# Altium PCB 65W LED Board.PcbDoc (part 2 of 3)
Units mm, origin at the board's own origin, x right, y up, seen from the top; angles counter-clockwise.
Board outline 40 x 69 mm, 4 copper layers (Top Layer, Layer 1, Layer 2, Bottom Layer), stack 1.573 mm thick; 54 components, 26 nets, 122 pads, 144 vias.
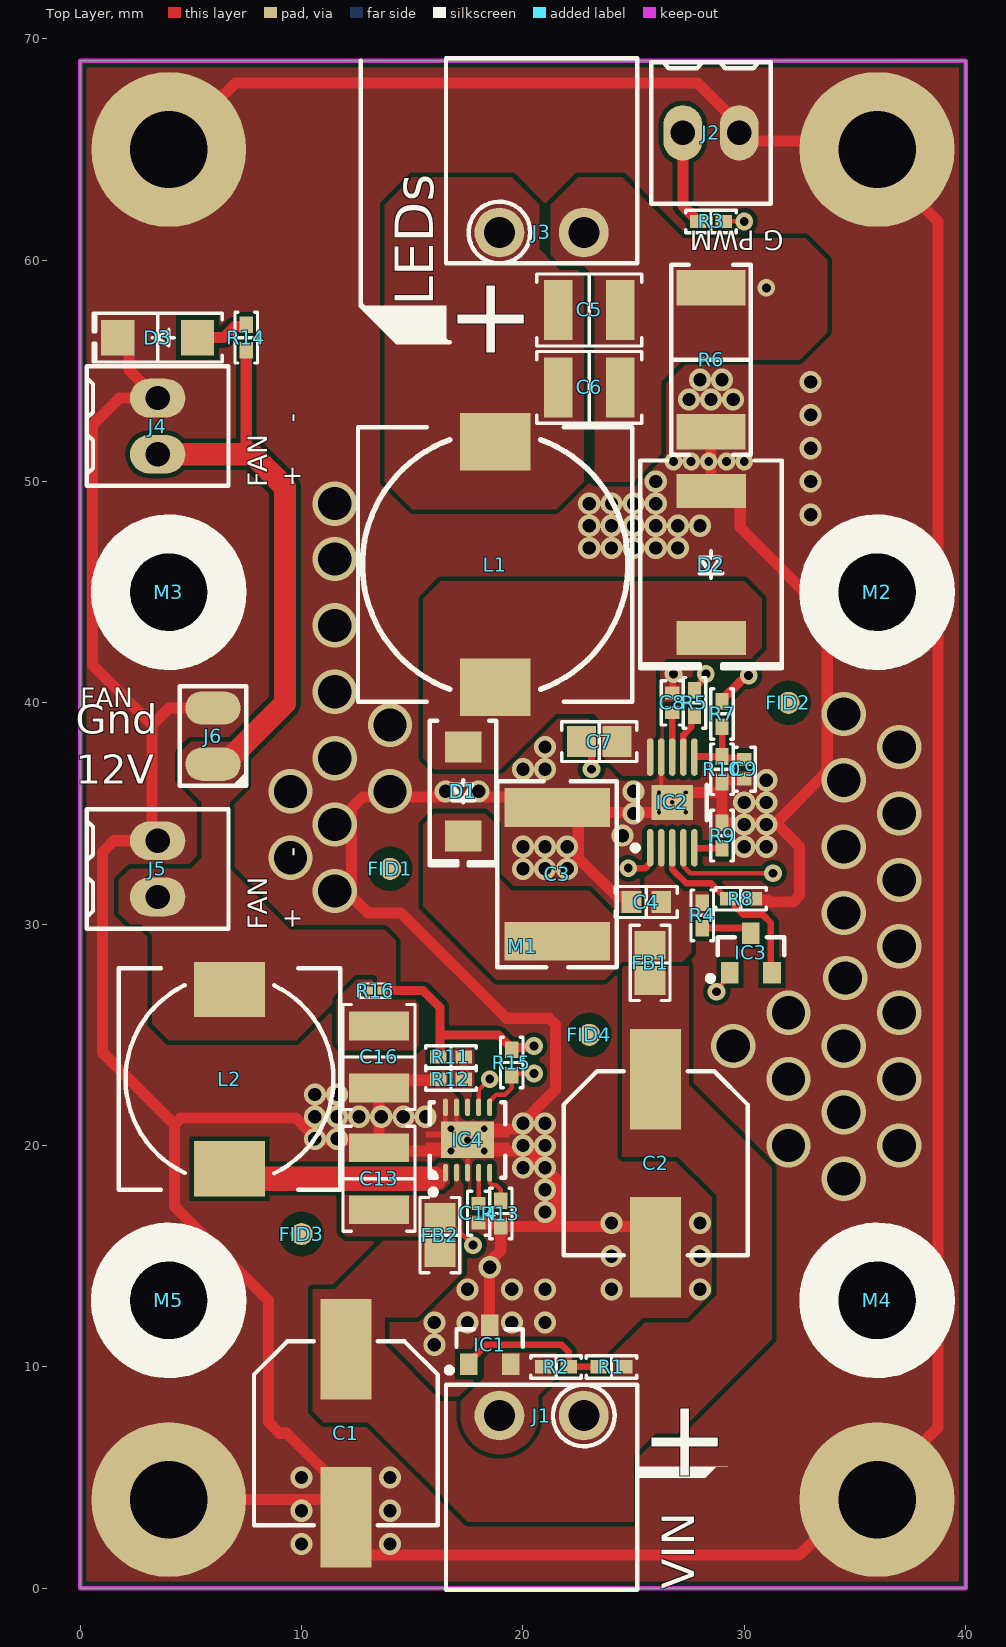
[diagram p0: Top Layer view]

## Part data (continued)
J2 J4 J5: "TERM BLK 2P SIDE ENT 2.54MM PCB", Color=Green, Current=10A, Flammability Rating="UL94 V-0", Manufacturer 1="TE Connectivity", Manufacturer Part Number 1=282834-2, Max Operating Temperature=105°C, Max Supply Voltage (AC)=150V, Min Operating Temperature=-40°C, Package Quantity=300, Supplier Part Number 1=A98333-ND, Approvals=UL, Category="Terminal Blocks", Closed End="No (Without)", ComponentLink1Description=https://datasheet.ciiva.com/11758/0900766b80e7dc96-11758675.pdf?src-supplier=RSComponents, ComponentLink1URL=https://datasheet.ciiva.com/11758/0900766b80e7dc96-11758675.pdf?src-supplier=RSComponents, ComponentLink2Description=https://datasheet.ciiva.com/16386/282834-2-16386363.pdf?src-supplier=Future+Electronics, ComponentLink2URL=https://datasheet.ciiva.com/16386/282834-2-16386363.pdf?src-supplier=Future+Electronics, ComponentLink3Description=https://datasheet.ciiva.com/15169/getdatasheetpartid-155864-15169558.pdf?src-supplier=Verical, ComponentLink3URL=https://datasheet.ciiva.com/15169/getdatasheetpartid-155864-15169558.pdf?src-supplier=Verical, ComponentLink4Description=https://datasheet.ciiva.com/16676/eng-cs-1308389-eurostyle-terminal-blocks-0607-16676126.pdf?src-supplier=Avnet+Europe, ComponentLink4URL=https://datasheet.ciiva.com/16676/eng-cs-1308389-eurostyle-terminal-blocks-0607-16676126.pdf?src-supplier=Avnet+Europe, ComponentLink5Description=https://datasheet.ciiva.com/30166/eng-cs-1308389-eurostyle-terminal-blocks-0607-30166974.pdf?src-supplier=Onlinecomponents.com, ComponentLink5URL=https://datasheet.ciiva.com/30166/eng-cs-1308389-eurostyle-terminal-blocks-0607-30166974.pdf?src-supplier=Onlinecomponents.com, ComponentLink6Description=https://datasheet.ciiva.com/14609/70086732-14609670.pdf?src-supplier=Allied+Electronics, ComponentLink6URL=https://datasheet.ciiva.com/14609/70086732-14609670.pdf?src-supplier=Allied+Electronics, ComponentLink7Description=https://datasheet.ciiva.com/3141/eng-cs-1308389-eurostyle-terminal-blocks-0607-3141115.pdf?src-supplier=Avnet, ComponentLink7URL=https://datasheet.ciiva.com/3141/eng-cs-1308389-eurostyle-terminal-blocks-0607-3141115.pdf?src-supplier=Avnet, ComponentLink8Description=https://datasheet.ciiva.com/823/eng-cd-282834-c1-823453.pdf?src-supplier=Digi-Key, ComponentLink8URL=https://datasheet.ciiva.com/823/eng-cd-282834-c1-823453.pdf?src-supplier=Digi-Key, Connector Type=Receptacle, Contact Material=Brass, Contact Plating=Tin, Current Rating=10A, Depth=6.5mm, ELV=Compliant, Gender=Male, Housing Color=Green, Housing Material=Polyamide, Interlock="No (Without)", Lead Free="Lead Free", Length=5.54mm, Material=Nylon, Max Current Rating=10A, Max Voltage Rating (AC)=150V, Mount="Through Hole", Number of Circuits=2, Number of Contacts=2, Number of Levels=1, Number of Poles=2, Number of Positions=2, Number of Positions Per Level=2, Number of Rows=1, Orientation=Straight, Packaging=Bulk, Pitch=2.54mm, Plating=Brass,Steel, Pricing 1="1=0.88000, 10=0.62000, 25=0.57840, 50=0.52500, 100=0.52280, 250=0.44144, 500=0.41822, 1000=0.37175, 5000=0.34852 (USD)", Radiation Hardening=No, REACH SVHC=Unknown, RoHS=Yes, Screw Flange="No (Without)", Screwless Terminal Block="Yes (With)", Side Stackable="Yes (With)", Stock 1=16578, Supplier 1=Digi-Key, Tail Length=3.4mm, Termination=Solder, Thread Size=M1.6, Voltage=150V, Voltage Rating=150V, Width=6.5mm, Wire Gauge (Max)=30AWG, Wire Gauge (Min)=30AWG, Wire/Cable Gauge=30AWG
L1: library part Inductor, "INDUCTOR SHIELD PWR 33UH 12575", Case/Package=Nonstandard, Current Rating=3.4A, DC Resistance (DCR)=47.4mR, Manufacturer 1=TDK, Manufacturer Part Number 1=SLF12575T-330M3R2-PF, Max Operating Temperature=105°C, Min Operating Temperature=-40°C, Package Quantity=500, Saturation Current=3.2A, Supplier Part Number 1=445-173081-1-ND, Test Frequency=1kHz, Tolerance=20%, Category="Fixed Inductors", ComponentLink1Description=https://datasheet.ciiva.com/3865/print-detail-pdf-phplangenpart-noslf12575t-330m3r2-pfnreimp-unit-3865589.pdf?src-supplier=Arrow, ComponentLink1URL=https://datasheet.ciiva.com/3865/print-detail-pdf-phplangenpart-noslf12575t-330m3r2-pfnreimp-unit-3865589.pdf?src-supplier=Arrow, ComponentLink2Description=https://datasheet.ciiva.com/11802/0900766b812b7d4f-11802238.pdf?src-supplier=RSComponents, ComponentLink2URL=https://datasheet.ciiva.com/11802/0900766b812b7d4f-11802238.pdf?src-supplier=RSComponents, Composition=Wirewound, Core Material=Ferrite, DC Current=3.4A, Depth=12.8mm, Height=7.5mm, Height - Seated (Max)=0.309inch, Inductance=33uH, Lead Free="Lead Free", Length=12.5mm, Max DC Current=3.4A, Military Standard=Not, Mount="Surface Mount", Packaging="Tape and Reel", Pricing 1="1=2.06000, 10=1.89800, 100=1.32830 (USD)", RoHS=Yes, Shielding=Shielded, Stock 1=2896, Supplier 1=Digi-Key, Termination=SMD/SMT, Width=0.492inch
L2: library part Inductor, "FIXED IND 100UH 1.1A 240 MOHM", Case/Package=Nonstandard, Current Rating=1.1A, DC Resistance (DCR)=240mR, Inductance Tolerance=20%, Manufacturer 1=TDK, Manufacturer Part Number 1=SLF10145T-101M1R0-PF, Max DC Current=1A, Max Operating Temperature=105°C, Min Operating Temperature=-20°C, Package Quantity=500, Supplier Part Number 1=445-1976-1-ND, Test Frequency=1kHz, Category="Fixed Inductors", ComponentLink1Description=https://datasheet.ciiva.com/3866/print-detail-pdf-phplangenpart-noslf10145t-101m1r0-pfnreimp-unit-3866420.pdf?src-supplier=Arrow, ComponentLink1URL=https://datasheet.ciiva.com/3866/print-detail-pdf-phplangenpart-noslf10145t-101m1r0-pfnreimp-unit-3866420.pdf?src-supplier=Arrow, ComponentLink2Description=https://datasheet.ciiva.com/16292/slf10145t-101m1r0-pf-16292665.pdf?src-supplier=Future+Electronics, ComponentLink2URL=https://datasheet.ciiva.com/16292/slf10145t-101m1r0-pf-16292665.pdf?src-supplier=Future+Electronics, ComponentLink3Description=https://datasheet.ciiva.com/11798/0900766b812b7d4f-11798954.pdf?src-supplier=RSComponents, ComponentLink3URL=https://datasheet.ciiva.com/11798/0900766b812b7d4f-11798954.pdf?src-supplier=RSComponents, ComponentLink4Description=https://datasheet.ciiva.com/26793/slf10145t-101m1r0-pf-26793460.pdf?src-supplier=IIIC, ComponentLink4URL=https://datasheet.ciiva.com/26793/slf10145t-101m1r0-pf-26793460.pdf?src-supplier=IIIC, ComponentLink5Description=https://datasheet.ciiva.com/28425/1838969-28425877.pdf?src-supplier=Element14, ComponentLink5URL=https://datasheet.ciiva.com/28425/1838969-28425877.pdf?src-supplier=Element14, Composition=Wirewound, Core Material=Ferrite, DC Current=1.1A, Depth=10.4mm, Height=4.5mm, Height - Seated (Max)=0.189inch, Inductance=100uH, Lead Free="Lead Free", Length=10.1mm, Military Standard=Not, Mount="Surface Mount", Packaging="Tape and Reel", Pricing 1="1=1.21000, 10=1.12100, 100=0.81080 (USD)", Radiation Hardening=No, REACH SVHC="No SVHC", RMS Current (Irms)=1.1A, RoHS=Yes, Saturation Current=1A, Shielding=Shielded, Stock 1=18972, Supplier 1=Digi-Key, Termination=SMD/SMT, Tolerance=20%, Width=10.1mm
M1: "FAN AXIAL 40X40X15MM 12V WIRE", Case/Package=Axial, Current Rating=130mA, Manufacturer 1="Delta Design", Manufacturer Part Number 1=AFB0412HHB-F00, Max Operating Temperature=158°C, Max Power Dissipation=1.56W, Min Operating Temperature=14°C, Package Quantity=448, Supplier Part Number 1=603-1996-ND, Voltage Rating=12V, Airflow=11.5CFM, Approvals=UL,CSA,VDE,CE, Bearing Type=Ball, Category=Uncategorized, ComponentLink1Description=http://components.arrow.com/part/dataview/51230374S8860450N1419?src-supplier=Arrow, ComponentLink1URL=http://components.arrow.com/part/dataview/51230374S8860450N1419?src-supplier=Arrow, ComponentLink2Description=http://www.delta-fan.com/Download/Spec/AFB0412HHB-F00.pdf?src-supplier=Digi-Key, ComponentLink2URL=http://www.delta-fan.com/Download/Spec/AFB0412HHB-F00.pdf?src-supplier=Digi-Key, Depth=40mm, Housing Material=Plastic, Length=40mm, Noise=32dBA, Noise Level=32dB, Power Rating=1.56W, Pricing 1="1=13.69000, 10=12.79300, 25=11.60240, 50=10.71000, 100=9.37130, 250=8.77624, 500=8.18126 (USD)", RoHS=Yes, RPM=8300RPM, Stock 1=576, Supplier 1=Digi-Key, Termination="3 Wire Leads", Weight=0.055lb, Width=15mm
M2 M3 M4 M5: "HEX STANDOFF M3 NYLON 1/2", Color=Natural, Manufacturer 1="Essentra Components", Manufacturer Part Number 1=NTS-12, Package Quantity=1000, Supplier Part Number 1=RPC4557-ND, Category="Spacers, Standoffs", ComponentLink1Description=http://www.essentracomponents.com.sg/images-line/pdfs/NTS.pdf?src-supplier=Digi-Key, ComponentLink1URL=http://www.essentracomponents.com.sg/images-line/pdfs/NTS.pdf?src-supplier=Digi-Key, Gender="Male, Female", Lead Free="Lead Free", Length=0.75inch, Material=Nylon, Outside Diameter=0.236inch, Pricing 1="1=0.60000, 10=0.55600, 25=0.51320, 100=0.42770, 500=0.34212, 1000=0.30791, 5000=0.24804, 10000=0.21383, 25000=0.17106 (USD)", RoHS=Yes, Stock 1=8273, Supplier 1=Digi-Key, Thread Size=M3, Threaded/Unthreaded=Threaded
R1: library part Resistor, "RES SMD 33K OHM 5% 1/16W 0402", Case Code (Imperial)=0402, Case Code (Metric)=1005, Manufacturer 1=Yageo, Manufacturer Part Number 1=RC0402JR-0733KL, Max Operating Temperature=155°C, Min Operating Temperature=-55°C, Power Rating=63mW, Supplier Part Number 1=311-33KJRCT-ND, Temperature Coefficient=100ppm/°C, Tolerance=5%, Voltage Rating=50V, Case/Package=0402, Category="Chip SMD Resistors", ComponentLink1Description=https://datasheet.ciiva.com/7850/1018594-7850198.pdf?src-supplier=Element14, ComponentLink1URL=https://datasheet.ciiva.com/7850/1018594-7850198.pdf?src-supplier=Element14, ComponentLink2Description=https://datasheet.ciiva.com/7850/1018594-7850199.pdf?src-supplier=Element14, ComponentLink2URL=https://datasheet.ciiva.com/7850/1018594-7850199.pdf?src-supplier=Element14, ComponentLink3Description=https://datasheet.ciiva.com/16740/pyu-rc0402-51-rohs-l-6-r-16740743.pdf?src-supplier=Future+Electronics, ComponentLink3URL=https://datasheet.ciiva.com/16740/pyu-rc0402-51-rohs-l-6-r-16740743.pdf?src-supplier=Future+Electronics, ComponentLink4Description=https://datasheet.ciiva.com/5558/pyu-rc0402-51-rohs-l-6-r-5558154.pdf?src-supplier=Mouser, ComponentLink4URL=https://datasheet.ciiva.com/5558/pyu-rc0402-51-rohs-l-6-r-5558154.pdf?src-supplier=Mouser, ComponentLink5Description=https://datasheet.ciiva.com/7983/1018594-7983578.pdf?src-supplier=Element14, ComponentLink5URL=https://datasheet.ciiva.com/7983/1018594-7983578.pdf?src-supplier=Element14, Composition="Thick Film", Depth=0.5mm, Lead Free="Lead Free", Length=1mm, Military Standard=Not, Number of Terminations=2, Packaging="Tape and Reel", Pricing 1="1=0.10000, 10=0.01300, 100=0.00530, 1000=0.00236, 2500=0.00205, 5000=0.00169 (USD)", REACH SVHC="No SVHC", Resistance=33kR, RoHS=Yes, Stock 1=1421022, Supplier 1=Digi-Key, Termination=SMD/SMT, Working Voltage=50V
R2 R15: library part Resistor, "RES SMD 10K OHM 5% 1/16W 0402", Case Code (Imperial)=0402, Case Code (Metric)=1005, Manufacturer 1=Yageo, Manufacturer Part Number 1=RC0402JR-0710KL, Max Operating Temperature=155°C, Max Power Dissipation=63mW, Min Operating Temperature=-55°C, Package Quantity=1, Power Rating=62.5mW, Supplier Part Number 1=311-10KJRCT-ND, Temperature Coefficient=100ppm/°C, Tolerance=5%, Voltage Rating=50V, Case/Package=0402, Category="Chip SMD Resistors", ComponentLink1Description=https://datasheet.ciiva.com/2452/pyu-r-int-thick-7-2452626.pdf?src-supplier=Digi-Key, ComponentLink1URL=https://datasheet.ciiva.com/2452/pyu-r-int-thick-7-2452626.pdf?src-supplier=Digi-Key, ComponentLink2Description=https://datasheet.ciiva.com/7850/1018594-7850136.pdf?src-supplier=Element14, ComponentLink2URL=https://datasheet.ciiva.com/7850/1018594-7850136.pdf?src-supplier=Element14, ComponentLink3Description=https://datasheet.ciiva.com/2452/pyu-r-int-thick-7-2452627.pdf?src-supplier=Digi-Key, ComponentLink3URL=https://datasheet.ciiva.com/2452/pyu-r-int-thick-7-2452627.pdf?src-supplier=Digi-Key, ComponentLink4Description=https://datasheet.ciiva.com/2452/pyu-r-int-thick-7-2452628.pdf?src-supplier=Digi-Key, ComponentLink4URL=https://datasheet.ciiva.com/2452/pyu-r-int-thick-7-2452628.pdf?src-supplier=Digi-Key, ComponentLink5Description=https://datasheet.ciiva.com/7850/1018594-7850137.pdf?src-supplier=Element14, ComponentLink5URL=https://datasheet.ciiva.com/7850/1018594-7850137.pdf?src-supplier=Element14, ComponentLink6Description=https://datasheet.ciiva.com/12669/pyu-rc0402-51-rohs-l-6-r-12669687.pdf?src-supplier=Mouser, ComponentLink6URL=https://datasheet.ciiva.com/12669/pyu-rc0402-51-rohs-l-6-r-12669687.pdf?src-supplier=Mouser, Composition="Thick Film", Depth=0.5mm, Features="Moisture Resistant", Height=0.016inch, Lead Free="Lead Free", Length=1mm, Military Standard=Not, Number of Terminations=2, Packaging="Tape and Reel", Pricing 1="1=0.10000, 10=0.01300, 100=0.00530, 1000=0.00236, 2500=0.00205, 5000=0.00169 (USD)", REACH SVHC=Unknown, Resistance=10kR, RoHS=Yes, Stock 1=29833785, Supplier 1=Digi-Key, Termination=SMD/SMT, Width=0.02inch
R3 R14: library part Resistor, "ESR Series 680 Ω ±5 % 0.33 W ±200 ppm/°C 1206 SMT Anti-Surge Chip Resistor", Case/Package=1206, Manufacturer 1=Rohm, Manufacturer Part Number 1=ESR18EZPJ681, Max Operating Temperature=155°C, Min Operating Temperature=-55°C, Power Rating=330mW, Supplier Part Number 1=RHM680ICT-ND, Temperature Coefficient=200ppm/°C, Tolerance=5%, Working Voltage=200V, Category="Chip SMD Resistors", ComponentLink1Description=https://www.rohm.com/datasheet/ESR01MZPF/esr-e?src-supplier=Digi-Key, ComponentLink1URL=https://www.rohm.com/datasheet/ESR01MZPF/esr-e?src-supplier=Digi-Key, ComponentLink2Description=http://www.rohm.com/web/global/datasheet/ESR01MZPJ/esr-e?src-supplier=Future+Electronics, ComponentLink2URL=http://www.rohm.com/web/global/datasheet/ESR01MZPJ/esr-e?src-supplier=Future+Electronics, Lead Free="Lead Free", Number of Terminations=2, Pricing 1="1=0.17000, 10=0.14000, 100=0.05460, 1000=0.02287, 2500=0.02096 (USD)", Resistance=680R, RoHS=Yes, Stock 1=129280, Supplier 1=Digi-Key
R4: library part Resistor, "RES SMD 51K OHM 5% 1/16W 0402", Case Code (Imperial)=0402, Case Code (Metric)=1005, Manufacturer 1=Yageo, Manufacturer Part Number 1=RC0402JR-0751KL, Max Operating Temperature=155°C, Min Operating Temperature=-55°C, Power Rating=62.5mW, Supplier Part Number 1=311-51KJRCT-ND, Temperature Coefficient=100ppm/°C, Tolerance=5%, Voltage Rating=50V, Case/Package=0402, Category="Chip SMD Resistors", ComponentLink1Description=https://datasheet.ciiva.com/7983/1018594-7983589.pdf?src-supplier=Element14, ComponentLink1URL=https://datasheet.ciiva.com/7983/1018594-7983589.pdf?src-supplier=Element14, ComponentLink2Description=https://datasheet.ciiva.com/12558/pyu-rc0402-51-rohs-l-6-r-8721-12558459.pdf?src-supplier=Mouser, ComponentLink2URL=https://datasheet.ciiva.com/12558/pyu-rc0402-51-rohs-l-6-r-8721-12558459.pdf?src-supplier=Mouser, ComponentLink3Description=https://datasheet.ciiva.com/8888/pyu-rc0402-51-rohs-l-6-8888893.pdf?src-supplier=Avnet, ComponentLink3URL=https://datasheet.ciiva.com/8888/pyu-rc0402-51-rohs-l-6-8888893.pdf?src-supplier=Avnet, ComponentLink4Description=https://datasheet.ciiva.com/16940/pyu-rc0402-51-rohs-l-6-16940349.pdf?src-supplier=Avnet+Europe, ComponentLink4URL=https://datasheet.ciiva.com/16940/pyu-rc0402-51-rohs-l-6-16940349.pdf?src-supplier=Avnet+Europe, ComponentLink5Description=https://datasheet.ciiva.com/28386/pyu-rc0402-51-rohs-l-6-28386863.pdf?src-supplier=Avnet+Europe, ComponentLink5URL=https://datasheet.ciiva.com/28386/pyu-rc0402-51-rohs-l-6-28386863.pdf?src-supplier=Avnet+Europe, Composition="Thick Film", Contact Plating=Tin,Matte, Depth=0.5mm, Height=0.35mm, Lead Free="Lead Free", Length=1mm, Military Standard=Not, Number of Pins=2, Packaging="Tape and Reel", Pricing 1="1=0.10000, 10=0.01300, 100=0.00530, 1000=0.00236, 2500=0.00205, 5000=0.00169 (USD)", Radiation Hardening=No, REACH SVHC="No SVHC", Resistance=51kR, RoHS=Yes, Stock 1=392511, Supplier 1=Digi-Key, Termination=SMD/SMT, Voltage Rating (DC)=50V, Width=0.5mm
R5: library part Resistor, "RES SMD 1K OHM 1% 1/16W 0402", Case Code (Imperial)=0402, Case Code (Metric)=1005, Manufacturer 1="Vishay Dale", Manufacturer Part Number 1=CRCW04021K00FKED, Max Operating Temperature=155°C, Max Power Dissipation=63mW, Min Operating Temperature=-55°C, Package Quantity=10, Supplier Part Number 1=541-1.00KLCT-ND, Temperature Coefficient=100ppm/°C, Tolerance=1%, Voltage Rating=50V, Case/Package=0402, Category="Chip SMD Resistors", ComponentLink10Description=https://datasheet.ciiva.com/3256/dcrcwe3-3256140.pdf?src-supplier=Avnet, ComponentLink10URL=https://datasheet.ciiva.com/3256/dcrcwe3-3256140.pdf?src-supplier=Avnet, ComponentLink11Description=https://datasheet.ciiva.com/16721/70201119-16721452.pdf?src-supplier=Allied+Electronics, ComponentLink11URL=https://datasheet.ciiva.com/16721/70201119-16721452.pdf?src-supplier=Allied+Electronics, ComponentLink12Description=https://datasheet.ciiva.com/16287/dcrcwe3-16287807.pdf?src-supplier=Future+Electronics, ComponentLink12URL=https://datasheet.ciiva.com/16287/dcrcwe3-16287807.pdf?src-supplier=Future+Electronics, ComponentLink1Description=https://datasheet.ciiva.com/11808/0900766b80d98824-11808638.pdf?src-supplier=RSComponents, ComponentLink1URL=https://datasheet.ciiva.com/11808/0900766b80d98824-11808638.pdf?src-supplier=RSComponents, ComponentLink2Description=https://datasheet.ciiva.com/2463/dcrcwe3-2463028.pdf?src-supplier=Digi-Key, ComponentLink2URL=https://datasheet.ciiva.com/2463/dcrcwe3-2463028.pdf?src-supplier=Digi-Key, ComponentLink3Description=https://datasheet.ciiva.com/2463/dcrcwe3-2463029.pdf?src-supplier=Digi-Key, ComponentLink3URL=https://datasheet.ciiva.com/2463/dcrcwe3-2463029.pdf?src-supplier=Digi-Key, ComponentLink4Description=https://datasheet.ciiva.com/7743/dcrcwe3-7743477.pdf?src-supplier=Element14, ComponentLink4URL=https://datasheet.ciiva.com/7743/dcrcwe3-7743477.pdf?src-supplier=Element14, ComponentLink5Description=https://datasheet.ciiva.com/2463/dcrcwe3-2463030.pdf?src-supplier=Digi-Key, ComponentLink5URL=https://datasheet.ciiva.com/2463/dcrcwe3-2463030.pdf?src-supplier=Digi-Key, ComponentLink6Description=https://datasheet.ciiva.com/26316/fld-crcw-e3-data-en-26316646.pdf?src-supplier=Distrelec, ComponentLink6URL=https://datasheet.ciiva.com/26316/fld-crcw-e3-data-en-26316646.pdf?src-supplier=Distrelec, ComponentLink7Description=https://datasheet.ciiva.com/16941/dcrcwe3-16941146.pdf?src-supplier=Avnet+Europe, ComponentLink7URL=https://datasheet.ciiva.com/16941/dcrcwe3-16941146.pdf?src-supplier=Avnet+Europe, ComponentLink8Description=https://datasheet.ciiva.com/3256/dcrcwe3-3256139.pdf?src-supplier=Avnet, ComponentLink8URL=https://datasheet.ciiva.com/3256/dcrcwe3-3256139.pdf?src-supplier=Avnet, ComponentLink9Description=https://datasheet.ciiva.com/46385/1697337-46385499.pdf?src-supplier=Element14, ComponentLink9URL=https://datasheet.ciiva.com/46385/1697337-46385499.pdf?src-supplier=Element14, Composition="Thick Film", Contact Plating=Tin, Depth=0.5mm, Features="Automotive AEC-Q200", Height=0.35mm, Lead Free="Lead Free", Length=1mm, Military Standard=Not, Mount="Surface Mount", Number of Pins=2, Number of Terminations=2, Packaging="Tape and Reel", Power Rating=63mW, Pricing 1="1=0.10000, 10=0.03800, 100=0.01540, 1000=0.00690, 2500=0.00599, 5000=0.00495 (USD)", Radiation Hardening=No, REACH SVHC=Unknown, Resistance=1kR, RoHS=Yes, Stock 1=1120778, Supplier 1=Digi-Key, Termination=SMD/SMT, Voltage Rating (DC)=50V, Weight=2.3E-05oz, Width=0.5mm
R6: library part Resistor, "RES 0.15 OHM 1% 2W 2512", Case Code (Imperial)=2512, Case Code (Metric)=6432, Manufacturer 1="Stackpole Electronics", Manufacturer Part Number 1=CSRN2512FKR150, Max Operating Temperature=155°C, Max Power Dissipation=2W, Min Operating Temperature=-55°C, Supplier Part Number 1=CSRN2512FKR150CT-ND, Temperature Coefficient=200ppm/°C, Tolerance=1%, Case/Package=2512, Category="Chip SMD Resistors", ComponentLink1Description=https://www.seielect.com/Catalog/SEI-CSR_CSRN.pdf?src-supplier=Avnet, ComponentLink1URL=https://www.seielect.com/Catalog/SEI-CSR_CSRN.pdf?src-supplier=Avnet, ComponentLink2Description=https://www.seielect.com/catalog/SEI-Packaging.pdf?src-supplier=Digi-Key, ComponentLink2URL=https://www.seielect.com/catalog/SEI-Packaging.pdf?src-supplier=Digi-Key, ComponentLink3Description=https://www.seielect.com/Catalog/SEI-CSR_CSRN.pdf?src-supplier=Digi-Key, ComponentLink3URL=https://www.seielect.com/Catalog/SEI-CSR_CSRN.pdf?src-supplier=Digi-Key, Composition="Thick Film", Contact Plating=Tin,Matte, Height=0.028inch, Lead Free="Lead Free", Length=0.25inch, Mount="Surface Mount", Number of Terminations=2, Packaging="Tape and Reel", Power Rating=2W, Pricing 1="1=0.73000, 10=0.52000, 25=0.40560, 50=0.34300, 100=0.27030, 250=0.22868, 500=0.18712 (USD)", Radiation Hardening=No, Resistance=150mR, RoHS=Yes, Stock 1=191606, Supplier 1=Digi-Key, Width=0.124inch
R7: library part Resistor, "Thick Film Resistors - SMD 63.4K OHM 1%", Case Code (Imperial)=0402, Case Code (Metric)=1005, Manufacturer 1=Yageo, Manufacturer Part Number 1=RC0402FR-0763K4L, Max Operating Temperature=155°C, Max Power Dissipation=63mW, Min Operating Temperature=-55°C, Power Rating=62.5mW, Supplier Part Number 1=YAG3204CT-ND, Temperature Coefficient=100ppm/°C, Tolerance=1%, Voltage Rating=50V, Case/Package=0402, Category="Chip SMD Resistors", ComponentLink1Description=https://datasheet.ciiva.com/16867/pyu-rc0402-51-rohs-l-6-16867462.pdf?src-supplier=Avnet+Europe, ComponentLink1URL=https://datasheet.ciiva.com/16867/pyu-rc0402-51-rohs-l-6-16867462.pdf?src-supplier=Avnet+Europe, ComponentLink2Description=https://datasheet.ciiva.com/16956/pyu-rc0402-51-rohs-l-6-r-16956407.pdf?src-supplier=Future+Electronics, ComponentLink2URL=https://datasheet.ciiva.com/16956/pyu-rc0402-51-rohs-l-6-r-16956407.pdf?src-supplier=Future+Electronics, ComponentLink3Description=https://datasheet.ciiva.com/8888/pyu-rc0402-51-rohs-l-6-8888540.pdf?src-supplier=Avnet, ComponentLink3URL=https://datasheet.ciiva.com/8888/pyu-rc0402-51-rohs-l-6-8888540.pdf?src-supplier=Avnet, ComponentLink4Description=https://datasheet.ciiva.com/28397/pyu-rc0402-51-rohs-l-6-28397772.pdf?src-supplier=Avnet+Europe, ComponentLink4URL=https://datasheet.ciiva.com/28397/pyu-rc0402-51-rohs-l-6-28397772.pdf?src-supplier=Avnet+Europe, Composition="Thick Film", Contact Plating=Tin,Matte, Depth=0.5mm, Features="Moisture Resistant", Height=0.016inch, Lead Free="Lead Free", Length=1mm, Military Standard=Not, Number of Terminations=2, Packaging="Tape and Reel", Pricing 1="1=0.10000, 10=0.01600, 100=0.00640, 1000=0.00289, 2500=0.00251, 5000=0.00207 (USD)", Resistance=63.4kR, RoHS=Yes, Stock 1=821571, Supplier 1=Digi-Key, Termination=SMD/SMT, Width=0.02inch
R8: library part Resistor, "RES SMD 1.54K OHM 1% 1/16W 0402", Case Code (Imperial)=0402, Case Code (Metric)=1005, Manufacturer 1=Vishay, Manufacturer Part Number 1=CRCW04021K54FKED, Max Operating Temperature=155°C, Max Power Dissipation=63mW, Min Operating Temperature=-55°C, Package Quantity=10, Supplier Part Number 1=541-1.54KLCT-ND, Temperature Coefficient=100ppm/°C, Tolerance=1%, Voltage Rating=50V, Case/Package=0402, Category="Chip SMD Resistors", ComponentLink1Description=https://datasheet.ciiva.com/2525/dcrcwe3-2525600.pdf?src-supplier=Digi-Key, ComponentLink1URL=https://datasheet.ciiva.com/2525/dcrcwe3-2525600.pdf?src-supplier=Digi-Key, ComponentLink2Description=https://datasheet.ciiva.com/2525/dcrcwe3-2525601.pdf?src-supplier=Digi-Key, ComponentLink2URL=https://datasheet.ciiva.com/2525/dcrcwe3-2525601.pdf?src-supplier=Digi-Key, ComponentLink3Description=https://datasheet.ciiva.com/7670/1697337-7670149.pdf?src-supplier=Element14, ComponentLink3URL=https://datasheet.ciiva.com/7670/1697337-7670149.pdf?src-supplier=Element14, ComponentLink4Description=https://datasheet.ciiva.com/7670/1697337-7670150.pdf?src-supplier=Element14, ComponentLink4URL=https://datasheet.ciiva.com/7670/1697337-7670150.pdf?src-supplier=Element14, ComponentLink5Description=https://datasheet.ciiva.com/16776/70201119-16776486.pdf?src-supplier=Allied+Electronics, ComponentLink5URL=https://datasheet.ciiva.com/16776/70201119-16776486.pdf?src-supplier=Allied+Electronics, ComponentLink6Description=https://datasheet.ciiva.com/5541/dcrcwe3-109170-5541384.pdf?src-supplier=Mouser, ComponentLink6URL=https://datasheet.ciiva.com/5541/dcrcwe3-109170-5541384.pdf?src-supplier=Mouser, ComponentLink7Description=https://datasheet.ciiva.com/22700/1697337-22700680.pdf?src-supplier=Element14, ComponentLink7URL=https://datasheet.ciiva.com/22700/1697337-22700680.pdf?src-supplier=Element14, ComponentLink8Description=https://datasheet.ciiva.com/8336/dcrcwe3-8336666.pdf?src-supplier=Avnet, ComponentLink8URL=https://datasheet.ciiva.com/8336/dcrcwe3-8336666.pdf?src-supplier=Avnet, ComponentLink9Description=https://datasheet.ciiva.com/2525/dcrcwe3-2525599.pdf?src-supplier=Digi-Key, ComponentLink9URL=https://datasheet.ciiva.com/2525/dcrcwe3-2525599.pdf?src-supplier=Digi-Key, Composition="Thick Film", Contact Plating=Tin, Depth=0.5mm, Features="Automotive AEC-Q200", Height=0.016inch, Lead Free="Lead Free", Length=1mm, Military Standard=Not, Number of Pins=2, Number of Terminations=2, Packaging="Tape and Reel", Power Rating=63mW, Pricing 1="1=0.10000, 10=0.03800, 100=0.01540, 1000=0.00690, 2500=0.00599, 5000=0.00495 (USD)", Radiation Hardening=No, REACH SVHC=Unknown, Resistance=1.54kR, RoHS=Yes, Stock 1=17020, Supplier 1=Digi-Key, Termination=SMD/SMT, Voltage Rating (DC)=50V, Weight=2.3E-05oz, Width=0.02inch
R9: library part Resistor, "Res Thick Film 0402 348K Ohm 1% 1/16W ±100ppm/°C Molded SMD Paper T/R", Case Code (Imperial)=0402, Case Code (Metric)=1005, Manufacturer 1=Yageo, Manufacturer Part Number 1=RC0402FR-07348KL, Max Operating Temperature=155°C, Max Power Dissipation=63mW, Min Operating Temperature=-55°C, Power Rating=62.5mW, Supplier Part Number 1=YAG3123CT-ND, Temperature Coefficient=100ppm/°C, Tolerance=1%, Voltage Rating=50V, Case/Package=0402, Category="Chip SMD Resistors", ComponentLink1Description=https://datasheet.ciiva.com/16857/pyu-rc0402-51-rohs-l-6-16857381.pdf?src-supplier=Avnet+Europe, ComponentLink1URL=https://datasheet.ciiva.com/16857/pyu-rc0402-51-rohs-l-6-16857381.pdf?src-supplier=Avnet+Europe, ComponentLink2Description=https://datasheet.ciiva.com/8886/pyu-rc0402-51-rohs-l-6-8886059.pdf?src-supplier=Avnet, ComponentLink2URL=https://datasheet.ciiva.com/8886/pyu-rc0402-51-rohs-l-6-8886059.pdf?src-supplier=Avnet, ComponentLink3Description=https://datasheet.ciiva.com/12558/pyu-rc0402-51-rohs-l-6-r-8721-12558590.pdf?src-supplier=Mouser, ComponentLink3URL=https://datasheet.ciiva.com/12558/pyu-rc0402-51-rohs-l-6-r-8721-12558590.pdf?src-supplier=Mouser, ComponentLink4Description=https://datasheet.ciiva.com/17066/pyu-rc0402-51-rohs-l-6-r-17066126.pdf?src-supplier=Future+Electronics, ComponentLink4URL=https://datasheet.ciiva.com/17066/pyu-rc0402-51-rohs-l-6-r-17066126.pdf?src-supplier=Future+Electronics, Composition="Thick Film", Contact Plating=Tin,Matte, Depth=0.5mm, Features="Moisture Resistant", Height=0.016inch, Lead Free="Lead Free", Length=1mm, Military Standard=Not, Number of Terminations=2, Packaging="Tape and Reel", Pricing 1="1=0.10000, 10=0.01600, 100=0.00640, 1000=0.00289, 2500=0.00251, 5000=0.00207 (USD)", Resistance=348kR, RoHS=Yes, Stock 1=323500, Supplier 1=Digi-Key, Termination=SMD/SMT, Voltage Rating (DC)=50V, Width=0.02inch
R10: library part Resistor, "Thick Film Resistors - SMD 9.76K OHM 1%", Case Code (Imperial)=0402, Case Code (Metric)=1005, Manufacturer 1=Yageo, Manufacturer Part Number 1=RC0402FR-079K76L, Max Operating Temperature=155°C, Max Power Dissipation=63mW, Min Operating Temperature=-55°C, Power Rating=62.5mW, Supplier Part Number 1=YAG3270CT-ND, Temperature Coefficient=100ppm/°C, Tolerance=1%, Voltage Rating=50V, Case/Package=0402, Category="Chip SMD Resistors", ComponentLink1Description=https://datasheet.ciiva.com/16858/pyu-rc0402-51-rohs-l-6-16858152.pdf?src-supplier=Avnet+Europe, ComponentLink1URL=https://datasheet.ciiva.com/16858/pyu-rc0402-51-rohs-l-6-16858152.pdf?src-supplier=Avnet+Europe, ComponentLink2Description=https://datasheet.ciiva.com/28405/pyu-rc0402-51-rohs-l-6-28405720.pdf?src-supplier=Avnet+Europe, ComponentLink2URL=https://datasheet.ciiva.com/28405/pyu-rc0402-51-rohs-l-6-28405720.pdf?src-supplier=Avnet+Europe, ComponentLink3Description=https://datasheet.ciiva.com/8891/pyu-rc0402-51-rohs-l-6-8891386.pdf?src-supplier=Avnet, ComponentLink3URL=https://datasheet.ciiva.com/8891/pyu-rc0402-51-rohs-l-6-8891386.pdf?src-supplier=Avnet, Composition="Thick Film", Contact Plating=Tin,Matte, Depth=0.5mm, Features="Moisture Resistant", Height=0.016inch, Lead Free="Lead Free", Length=1mm, Military Standard=Not, Number of Terminations=2, Packaging="Tape and Reel", Pricing 1="1=0.10000, 10=0.01600, 100=0.00640, 1000=0.00289, 2500=0.00251, 5000=0.00207 (USD)", Resistance=9.76kR, RoHS=Yes, Stock 1=517674, Supplier 1=Digi-Key, Termination=SMD/SMT, Voltage Rating (DC)=50V, Width=0.5mm
R11: library part Resistor, "RES SMD 1.1M OHM 1% 1/16W 0402", Case Code (Imperial)=0402, Case Code (Metric)=1005, Manufacturer 1=Vishay, Manufacturer Part Number 1=CRCW04021M10FKED, Max Operating Temperature=155°C, Max Power Dissipation=63mW, Min Operating Temperature=-55°C, Package Quantity=10, Supplier Part Number 1=541-1.10MLCT-ND, Temperature Coefficient=100ppm/°C, Tolerance=1%, Voltage Rating=50V, Case/Package=0402, Category="Chip SMD Resistors", ComponentLink10Description=https://datasheet.ciiva.com/8336/dcrcwe3-8336635.pdf?src-supplier=Avnet, ComponentLink10URL=https://datasheet.ciiva.com/8336/dcrcwe3-8336635.pdf?src-supplier=Avnet, ComponentLink11Description=https://datasheet.ciiva.com/22870/70201119-22870587.pdf?src-supplier=Allied+Electronics, ComponentLink11URL=https://datasheet.ciiva.com/22870/70201119-22870587.pdf?src-supplier=Allied+Electronics, ComponentLink12Description=https://datasheet.ciiva.com/16214/dcrcwe3-16214269.pdf?src-supplier=Future+Electronics, ComponentLink12URL=https://datasheet.ciiva.com/16214/dcrcwe3-16214269.pdf?src-supplier=Future+Electronics, ComponentLink13Description=https://datasheet.ciiva.com/22674/1847332-22674766.pdf?src-supplier=Element14, ComponentLink13URL=https://datasheet.ciiva.com/22674/1847332-22674766.pdf?src-supplier=Element14, ComponentLink1Description=https://datasheet.ciiva.com/11809/0900766b80d98824-11809925.pdf?src-supplier=RSComponents, ComponentLink1URL=https://datasheet.ciiva.com/11809/0900766b80d98824-11809925.pdf?src-supplier=RSComponents, ComponentLink2Description=https://datasheet.ciiva.com/22708/1697337-22708309.pdf?src-supplier=Element14, ComponentLink2URL=https://datasheet.ciiva.com/22708/1697337-22708309.pdf?src-supplier=Element14, ComponentLink3Description=https://datasheet.ciiva.com/2463/dcrcwe3-2463607.pdf?src-supplier=Digi-Key, ComponentLink3URL=https://datasheet.ciiva.com/2463/dcrcwe3-2463607.pdf?src-supplier=Digi-Key, ComponentLink4Description=https://datasheet.ciiva.com/2463/dcrcwe3-2463608.pdf?src-supplier=Digi-Key, ComponentLink4URL=https://datasheet.ciiva.com/2463/dcrcwe3-2463608.pdf?src-supplier=Digi-Key, ComponentLink5Description=https://datasheet.ciiva.com/2463/dcrcwe3-2463609.pdf?src-supplier=Digi-Key, ComponentLink5URL=https://datasheet.ciiva.com/2463/dcrcwe3-2463609.pdf?src-supplier=Digi-Key, ComponentLink6Description=https://datasheet.ciiva.com/7670/1697337-7670458.pdf?src-supplier=Element14, ComponentLink6URL=https://datasheet.ciiva.com/7670/1697337-7670458.pdf?src-supplier=Element14, ComponentLink7Description=https://datasheet.ciiva.com/16771/70201119-16771898.pdf?src-supplier=Allied+Electronics, ComponentLink7URL=https://datasheet.ciiva.com/16771/70201119-16771898.pdf?src-supplier=Allied+Electronics, ComponentLink8Description=https://datasheet.ciiva.com/5541/dcrcwe3-109170-5541787.pdf?src-supplier=Mouser, ComponentLink8URL=https://datasheet.ciiva.com/5541/dcrcwe3-109170-5541787.pdf?src-supplier=Mouser, ComponentLink9Description=https://datasheet.ciiva.com/7670/1697337-7670459.pdf?src-supplier=Element14, ComponentLink9URL=https://datasheet.ciiva.com/7670/1697337-7670459.pdf?src-supplier=Element14, Composition="Thick Film", Contact Plating=Tin, Depth=0.5mm, Features="Automotive AEC-Q200", Height=0.35mm, Lead Free="Lead Free", Length=1mm, Military Standard=Not, Mount="Surface Mount", Number of Pins=2, Number of Terminations=2, Packaging="Tape and Reel", Power Rating=63mW, Pricing 1="1=0.10000, 10=0.03800, 100=0.01540, 1000=0.00690, 2500=0.00599, 5000=0.00495 (USD)", Radiation Hardening=No, REACH SVHC=Unknown, Resistance=1.1MR, RoHS=Yes, Stock 1=74010, Supplier 1=Digi-Key, Termination=SMD/SMT, Voltage Rating (DC)=50V, Weight=2.3E-05oz, Width=0.02inch
R12: library part Resistor, "RES 124K OHM 1% 1/16W 0402", Case Code (Imperial)=0402, Case Code (Metric)=1005, Manufacturer 1="Stackpole Electronics", Manufacturer Part Number 1=RMCF0402FT124K, Max Operating Temperature=155°C, Max Power Dissipation=63mW, Min Operating Temperature=-55°C, Package Quantity=10000, Supplier Part Number 1=RMCF0402FT124KCT-ND, Temperature Coefficient=100ppm/°C, Tolerance=1%, Case/Package=0402, Category="Chip SMD Resistors", ComponentLink1Description=http://www.seielect.com/Catalog/SEI-RMCF_RMCP.pdf?src-supplier=Digi-Key, ComponentLink1URL=http://www.seielect.com/Catalog/SEI-RMCF_RMCP.pdf?src-supplier=Digi-Key, ComponentLink2Description=https://www.seielect.com/Catalog/SEI-RMCF_RMCP.pdf?src-supplier=Avnet, ComponentLink2URL=https://www.seielect.com/Catalog/SEI-RMCF_RMCP.pdf?src-supplier=Avnet, ComponentLink3Description=https://www.seielect.com/Catalog/SEI-RMCF_RMCP.pdf?src-supplier=Digi-Key, ComponentLink3URL=https://www.seielect.com/Catalog/SEI-RMCF_RMCP.pdf?src-supplier=Digi-Key, ComponentLink4Description=https://www.seielect.com/catalog/SEI-Packaging.pdf?src-supplier=Digi-Key, ComponentLink4URL=https://www.seielect.com/catalog/SEI-Packaging.pdf?src-supplier=Digi-Key, Composition="Thick Film", Contact Plating=Tin,Matte, Features="Automotive AEC-Q200", Height=0.016inch, Lead Free="Lead Free", Length=0.039inch, Mount="Surface Mount", Number of Terminations=2, Packaging="Tape and Reel", Pricing 1="1=0.10000, 10=0.01500, 100=0.00610, 1000=0.00275, 2500=0.00239, 5000=0.00198 (USD)", Resistance=124kR, RoHS=Yes, Stock 1=5554, Supplier 1=Digi-Key, Width=0.02inch
R13: library part Resistor, "RES SMD 147K OHM 1% 1/16W 0402", Case Code (Imperial)=0402, Case Code (Metric)=1005, Manufacturer 1=Vishay, Manufacturer Part Number 1=CRCW0402147KFKED, Max Operating Temperature=155°C, Max Power Dissipation=63mW, Min Operating Temperature=-55°C, Package Quantity=10, Supplier Part Number 1=541-147KLCT-ND, Temperature Coefficient=100ppm/°C, Tolerance=1%, Voltage Rating=50V, Case/Package=0402, Category="Chip SMD Resistors", ComponentLink10Description=https://datasheet.ciiva.com/2463/dcrcwe3-2463205.pdf?src-supplier=Digi-Key, ComponentLink10URL=https://datasheet.ciiva.com/2463/dcrcwe3-2463205.pdf?src-supplier=Digi-Key, ComponentLink1Description=https://datasheet.ciiva.com/11817/0900766b80d98824-11817981.pdf?src-supplier=RSComponents, ComponentLink1URL=https://datasheet.ciiva.com/11817/0900766b80d98824-11817981.pdf?src-supplier=RSComponents, ComponentLink2Description=https://datasheet.ciiva.com/2463/dcrcwe3-2463206.pdf?src-supplier=Digi-Key, ComponentLink2URL=https://datasheet.ciiva.com/2463/dcrcwe3-2463206.pdf?src-supplier=Digi-Key, ComponentLink3Description=https://datasheet.ciiva.com/7714/1697337-7714166.pdf?src-supplier=Element14, ComponentLink3URL=https://datasheet.ciiva.com/7714/1697337-7714166.pdf?src-supplier=Element14, ComponentLink4Description=https://datasheet.ciiva.com/2463/dcrcwe3-2463207.pdf?src-supplier=Digi-Key, ComponentLink4URL=https://datasheet.ciiva.com/2463/dcrcwe3-2463207.pdf?src-supplier=Digi-Key, ComponentLink5Description=https://datasheet.ciiva.com/3256/dcrcwe3-3256056.pdf?src-supplier=Avnet, ComponentLink5URL=https://datasheet.ciiva.com/3256/dcrcwe3-3256056.pdf?src-supplier=Avnet, ComponentLink6Description=https://datasheet.ciiva.com/16880/dcrcwe3-16880808.pdf?src-supplier=Avnet+Europe, ComponentLink6URL=https://datasheet.ciiva.com/16880/dcrcwe3-16880808.pdf?src-supplier=Avnet+Europe, ComponentLink7Description=https://datasheet.ciiva.com/7714/1533075-7714362.pdf?src-supplier=Element14, ComponentLink7URL=https://datasheet.ciiva.com/7714/1533075-7714362.pdf?src-supplier=Element14, ComponentLink8Description=https://datasheet.ciiva.com/16436/dcrcwp-16436206.pdf?src-supplier=Future+Electronics, ComponentLink8URL=https://datasheet.ciiva.com/16436/dcrcwp-16436206.pdf?src-supplier=Future+Electronics, ComponentLink9Description=https://datasheet.ciiva.com/16773/70201119-16773311.pdf?src-supplier=Allied+Electronics, ComponentLink9URL=https://datasheet.ciiva.com/16773/70201119-16773311.pdf?src-supplier=Allied+Electronics, Composition="Thick Film", Contact Plating=Tin, Depth=0.5mm, Features="Automotive AEC-Q200", Height=0.35mm, Lead Free="Lead Free", Length=1mm, Military Standard=Not, Number of Pins=2, Number of Terminations=2, Packaging="Tape and Reel", Power Rating=63mW, Pricing 1="1=0.10000, 10=0.03800, 100=0.01540, 1000=0.00690, 2500=0.00599, 5000=0.00495 (USD)", Radiation Hardening=No, REACH SVHC=Unknown, Resistance=147kR, RoHS=Yes, Stock 1=447, Supplier 1=Digi-Key, Termination=SMD/SMT, Voltage Rating (DC)=50V, Weight=2.3E-05oz, Width=0.5mm
R16: library part Resistor, "RES SMD 1.1 OHM 5% 1/10W 0402", Case Code (Imperial)=0402, Case Code (Metric)=1005, Manufacturer 1=Panasonic, Manufacturer Part Number 1=ERJ-2GEJ1R1X, Max Operating Temperature=155°C, Max Power Dissipation=100mW, Min Operating Temperature=-55°C, Package Quantity=1, Supplier Part Number 1=P1.1JCT-ND, Temperature Coefficient=600ppm/°C, Tolerance=5%, Voltage Rating=50V, Case/Package=0402, Category="Chip SMD Resistors", ComponentLink1Description=https://datasheet.ciiva.com/9198/aoa0000ce1-9198710.pdf?src-supplier=Avnet, ComponentLink1URL=https://datasheet.ciiva.com/9198/aoa0000ce1-9198710.pdf?src-supplier=Avnet, ComponentLink2Description=https://datasheet.ciiva.com/43470/1678796-43470039.pdf?src-supplier=Farnell, ComponentLink2URL=https://datasheet.ciiva.com/43470/1678796-43470039.pdf?src-supplier=Farnell, Composition="Thick Film", Contact Plating=Tin, Depth=0.5mm, Height=0.016inch, Lead Free="Lead Free", Length=1mm, Military Standard=Not, Mount="Surface Mount", Number of Terminations=2, Packaging="Tape and Reel", Power Rating=100mW, Pricing 1="1=0.10000, 10=0.03100, 100=0.01250, 1000=0.00560, 2500=0.00486, 5000=0.00401 (USD)", REACH SVHC="No SVHC", Resistance=1.1R, RoHS=Yes, Stock 1=103645, Supplier 1=Digi-Key, Termination=SMD/SMT, Voltage Rating (DC)=50V, Width=0.02inch

## Free pads (board coordinates)
  round 7 hole 3.5 unplated: M(4,4) M(4,65) M(36,4) M(36,65)

## Via types
v1: diameter 1, hole 0.6, Top Layer to Bottom Layer, 86 vias
v2: diameter 2, hole 1.5, Top Layer to Bottom Layer, 30 vias
v3: diameter 0.8, hole 0.4, Top Layer to Bottom Layer, tented both sides, 18 vias
v4: diameter 0.6, hole 0.3, Top Layer to Bottom Layer, tented top, 5 vias
v5: diameter 0.5, hole 0.2, Top Layer to Bottom Layer, tented both sides, 5 vias

## Nets (pads, with @x,y where several pads share a name; then routed paths per layer and width w, separated by ;. In a path a pad name is that pad's centre, name@x,y a point inside that pad or via, vN(x,y) a via of type N, cw(c..) or ccw(c..) an arc to the next point about the centre after c; other vN are vias at no path point)
12FB: IC4.8 R11.1 R12.2 | length 1
  Top Layer w0.4: R12.2 R11.1
12RT: IC4.5 R13.2 | length 1.6
  Top Layer w0.2: IC4.5 18.506,18.769 18.506,18.317 18.623,18.2 18.8,18.2 19,18 R13.2
12SS: C14.2 IC4.4 | length 1.4
  Top Layer w0.2: C14.2 IC4.4
12SW: IC4.1 L2.1 | length 9.4
  Top Layer w1.1: L2.1 7.2,18.5 16,18.5
12V: J4.1 J5.1 J6.1 L2.2 R7.1 R11.2 R14.1 R15.2 R16.2 | length 65.9
  Top Layer w0.4: R16.2 15.5,27 16.25,26.25 16.25,25 ; R11.2 16.25,24.075 16.25,25 ; v3(20.5,24.5) 20.423,24.423 19.598,24.423 R15.2 19.5,24.4 18.9,25 16.25,25 ; R7.1 29.1,40.175 29.1,40.25 29.789,40.939 29.797,40.939 30.092,41.234 v3(30.2,41.234)
  Top Layer w0.5: R14.1 7.5,51.5 7.77,51.23
  Top Layer w1: J4.1 7.77,51.23 9.25,49.75 9.25,39.98 6.5,37.23 J6.1
  Layer 2 w0.4: v3(20.5,24.5) 21.25,23.75 24.75,23.75 27.75,26.75 27.75,27.25 28.25,27.75 32.25,27.75 33.015,28.515 33.015,38.084 30.277,40.823 30.277,41.158 v3(30.2,41.234)
12V_PGOOD: IC3.1 IC4.6 R15.1 | length 14
  Top Layer w0.2: IC4.6 18.5,22.003 18.797,22.3 19.2,22.3 19.5,22.6 R15.1 19.575,23.25 v3(20.5,23.25) ; v3(28.75,26.95) 28.75,27.068 29.049,27.367 29.049,27.514 IC3.1
  Layer 2 w0.2: v3(20.5,23.25) 25,23.25 28.642,26.892 28.692,26.892 v3(28.75,26.95)
BOOT: C7.2 IC2.1 | length 8.4
  Top Layer w0.3: C7.2 23.1,37.8 v3(23.1,37) ; v3(24.759,32.533) 25.533,32.533 25.75,32.75 IC2.1
  Layer 2 w0.3: v3(23.1,37) 23.1,34.192 v3(24.759,32.533)
CN_GND: IC1.2 J1.2 R2.2
COMP: C8.1 IC2.8 | length 2
  Top Layer w0.3: IC2.8 C8.1
GND: C1.2 C2.2 C3.1 C4.1 C8.2 C9.1 C13.1 C14.1 C16.1 D2.1 D3.2 IC1.3 IC2.9 IC2.11 IC4.3 IC4.9 IC4.10 IC4.11 J2.2 J4.2 J5.2 J6.2 pad.M R6.1 R8.1 R9.1 R10.1 R12.1 R13.1 | length 320.8
  Top Layer w0.2: IC4.10 16.5,21 v4(16.75,20.75) 17,21 IC4.9 ; IC4.3 v4(17.5,20.25) ; v5(26.15,35.95) 26.25,36.05 IC2.9
  Top Layer w0.3: C8.2 26.775,40.465 26.775,41.275 v3(26.8,41.3)
  Top Layer w0.5: D3.2 2.2,56 2.2,55.033 J4.2@3.463,53.77 ; J4.2 J4.2@3.463,53.77 ; pad.M@4,4 11.2,4 C1.2 ; pad.M@4,65 4.01,65 7.01,68 27.895,68 29.77,66.125 J2.2 30.145,65.375 35.625,65.375 36,65 36,64.49 38.75,61.74 38.75,7.26 36,4.51 36,4 34.99,4 32.49,1.5 12.9,1.5 12,2.4 C1.2 ; J6.2 4.02,39.77 3.25,39 ; R12.1 16.125,22.95 13.85,22.95 C16.1 C13.1 ; v4(16.75,19.75) 13.65,19.75 C13.1 ; C14.1 18.05,16.45 18.95,16.45 19,16.4 R13.1 ; v4(18.25,19.75) 20.25,19.75 21.5,18.5 21.5,16.35 ; v4(18.25,20.75) 19.699,20.75 21.481,22.531 21.481,25.457 21.188,25.75 19.25,25.75 14.5,30.5 13,30.5 12.25,31.25 12.25,31.5 12.25,35.25 12.75,35.75 21.075,35.75 C3.1 21.775,35.05 C3.1@22.1,35.05 ; IC1.3 18.5,14.75 19,15.25 R13.1 ; C4.1 24.9,31.05 24.7,31.25 24.25,31.25 22.5,33 22.5,34.65 C3.1@22.1,35.05 ; C2.2 26,15.45 25.1,16.35 21.5,16.35 ; v5(26.15,35.05) C3.1@22.1,35.05 ; v5(27.35,35.95) 28.95,35.95 29,36 ; R6.1 D2.1 29.3,49.575 29.82,49.055 29.82,47.93 33.75,44 33.75,36.9 v1@31.425,34.575 ; C9.1 29.95,36.51 29.05,36.51 29,36.46 R10.1 29,36 ; R8.1@30.379,31.154 30.425,31.2 30.525,31.1 31.079,31.1 31.179,31 32.207,31 32.5,31.293 32.5,33.5 v1@31.425,34.575 ; 3.25,39 0.55,41.7 0.55,52.55 1.77,53.77 J4.2@3.463,53.77 ; 3.25,39 3.25,34.02 J5.2 1.52,33.77 1,33.25 1,24.207 4.25,20.957 ; 4.25,20.957 4.543,21.25 9.75,21.25 10.65,20.35 10.75,20.25 13.15,20.25 C13.1 ; 4.25,20.957 4.25,17.25 8.5,13 8.5,7.5 9,7 9.325,7 12,4.325 C1.2 ; R13.1 21.5,16.35 ; 29,36 R9.1 v1@31.425,34.575
  other v1: 10,2 14,2 10,3.5 14,3.5 10,5 14,5 16,11 16,12 17.5,12 19.5,12 21,12 17.5,13.5 19.5,13.5 21,13.5 24,13.5 28,13.5 18.5,14.5 24,15 28,15 24,16.5 28,16.5 21,17 21,18 20,19 21,19 20,20 21,20 10.6,20.3 11.6,20.3 20,21 21,21 10.6,21.3 11.6,21.3 12.6,21.3 13.6,21.3 14.6,21.3 15.6,21.3 10.6,22.3 11.6,22.3 20,32.5 21,32.5 22,32.5 20,33.5 21,33.5 22,33.5 30,33.5 31,33.5 24.5,34 30,34.5 31,34.5 25,35 30,35.5 31,35.5 16.5,36 18,36 25,36 31,36.5 20,37 21,37 21,38 23,47 24,47 25,47 26,47 27,47 23,48 24,48 25,48 26,48 27,48 28,48 33,48.5 23,49 24,49 25,49 26,49 26,50 33,50 33,51.5 33,53 27.5,53.7 28.5,53.7 29.5,53.7 33,54.5 28,54.6 29,54.6
  other v2: 34.5,18.5 32,20 37,20 34.5,21.5 32,23 37,23 29.5,24.5 34.5,24.5 32,26 37,26 34.56,27.566 37,29 34.5,30.5 11.5,31.5 37,32 9.5,33 34.5,33.5 11.5,34.5 37,35 9.5,36 14,36 34.5,36.5 11.5,37.5 37,38 14,39 34.5,39.5 11.5,40.5 11.5,43.5 11.5,46.5 11.5,49
  other v3: 26.8,50.9 27.6,50.9 28.4,50.9 29.2,50.9 30,50.9
  other v5: 27.35,35.05 26.75,35.5
IADJ: C9.2 IC2.6 R7.2 R10.2 | length 3.7
  Top Layer w0.3: IC2.6 27.75,37.575 R10.2 ; R7.2 R10.2 ; C9.2 29.933,37.507 29.068,37.507 R10.2
ISENSE: IC2.7 R5.1 | length 2.1
  Top Layer w0.3: IC2.7 27.25,38.55 27.6,38.9 27.6,39.275 R5.1
LEDVCC: C5.2 C6.2 J3.1 L1.2
LEDVSS: C5.1 C6.1 J3.2 R5.2 R6.2 | length 19.6
  Top Layer w0.3: R5.2 27.75,40.65 28.266,41.166 v3(28.266,41.3)
  Layer 2 w1: v3(28.266,41.3) 28.266,46.266 31.1,49.1 31.1,58.65 v3(31,58.75)
NetC13_2: C13.2 FB2.1 IC4.2 IC4.7 | length 17.4
  Top Layer w0.2: FB2.1 16.8,16.2 17.05,16.2 v3(17.75,15.5) ; IC4.7 18.006,21.731 18.006,22.504 v3(18.5,23) v3(18.5,23)
  Layer 2 w0.2: v3(17.75,15.5) 21.5,15.5 22,16 22,21.25 21.25,22 19.5,22 v3(18.5,23)
NetC16_2: C16.2 R16.1
NetD3_1: D3.1 R14.2 | length 2.5
  Top Layer w0.5: D3.1 6.5,56.5 7,57 7.45,57 7.5,57.05 R14.2
NetIC1_1: IC1.1 R1.1 R2.1 | length 7.1
  Top Layer w0.3: IC1.1 17.55,10.2 18.35,11 21.75,11 22.075,10.675 R2.1 R1.1
NetJ2_1: J2.1 R3.2 | length 4.3
  Top Layer w0.5: J2.1 27.23,62.445 27.8,61.875 27.8,61.8 27.85,61.75 R3.2
PDIM: IC2.4 R3.1 | length 39.9
  Top Layer w0.2: IC2.4 27.269,33.431 27.269,32.594 27.564,32.3 v3(31.3,32.3) ; R3.1 v3(30,61.75)
  Layer 2 w0.4: v3(30,61.75) 31.5,61.75 32,61.25 32,48.727 29.4,46.127 29.4,40.851 32.415,37.835 32.415,33.415 v3(31.3,32.3)
PH: C7.1 D1.1 D2.2 IC2.10 L1.1
RT: IC2.5 R9.2 | length 1.3
  Top Layer w0.3: IC2.5 27.75,33.425 R9.2
UVHS: IC3.3 R4.1 | length 2
  Top Layer w0.3: R4.1 IC3.3@30.06,29.825
UVLO: IC2.3 IC3.2 R8.2 | length 8.8
  Top Layer w0.3: IC2.3 26.75,32.477 27.377,31.85 27.75,31.85 ; 27.751,31.849 28.001,31.849 28.501,31.849 29.2,31.15 R8.2 29.35,31.15 29.5,31 29.5,30.9 29.8,30.6 29.805,30.6 29.984,30.421 30.846,30.421 31.2,30.067 IC3.2@31.2,27.783
VIN: C1.1 C2.1 FB1.2 FB2.2 J1.1 R1.2
VIN_DRV: C3.2 C4.2 D1.2 FB1.1 IC2.2 R4.2
pads on no net: FID1.F FID2.F FID3.F FID4.F M2.M M3.M M4.M M5.M

## Polygon pours and split planes (outlines as drawn)
GND on Top Layer "GND_L01_P033" (solid, remove dead copper, pour order 33): 0,0 0,69 40,69 40,0
LEDVSS on Top Layer "LEDVSS_L01_P030" (solid, remove dead copper, pour order 30): 21.25,62.5 22.5,63.75 24.5,63.75 27.25,61 32.75,61 33.75,60 33.75,56.75 32.5,55.5 27.25,55.5 26.25,54.5 26.25,51.25 25,50 23.25,50 23.25,59.25 22.75,59.75 21.75,59.75 21.25,60.25
LEDVCC on Top Layer "LEDVCC_L01_P032" (solid, remove dead copper, pour order 32): 13.75,50 15,48.75 21.5,48.75 22.75,50 22.75,59.25 22.25,59.75 21.5,59.75 20.75,60.5 20.75,62.5 19.5,63.75 15,63.75 13.75,62.5
PH on Top Layer "PH_L01_P031" (solid, remove dead copper, pour order 31): 26,41.5 26.5,42 30.3,42 30.8,42.5 30.8,44.7 30,45.5 16.3,45.5 15.5,44.7 15.5,37.5 16,37 19,37 21.5,39.5 23.2,39.5 23.5,39.2 23.5,37.7 24.5,36.7 26,36.7
VIN_DRV on Top Layer "VIN_DRV_L01_P026" (solid, remove dead copper, pour order 26): 26,34.1 26.5,34.1 26.5,32.3 27.1,31.7 28.1,31.7 28.4,31.4 28.4,30.4 27.6,30.4 27.6,28.7 27.2,28.3 24.5,28.3 23.7,27.5 18.8,27.5 15.5,30.8 15.5,34.5 16,35 18.3,35 18.8,34.5 18.8,32.2 19.5,31.5 23,31.5 24.2,30.3 25.5,30.3 25.5,32.1 26,32.6
12V on Top Layer "12V_L01_P023" (solid, remove dead copper, pour order 23): 5,38.25 4.5,37.75 4.5,36.5 5.5,35.5 5.5,33 5,32.5 5,32.25 6.5,32.25 6.75,32.5 6.75,35.5 7.5,36.25 7.5,37.75 7,38.25
NetC13_2 on Top Layer "NETC13_2_L01_P022" (solid, remove dead copper, pour order 22): 17.2,19.2 16.8,19.2 16.8,18.2 16.4,17.8 12,17.8 11.8,17.6 11.8,16.1 12,15.9 17.1,15.9 17.3,16.1 17.3,18.3 17.2,18.4
NetC16_2 on Top Layer "NETC16_2_L01_P021" (solid, remove dead copper, pour order 21): 13.42,27.375 13.295,27.5 12.5,27.5 11.6,26.6 11.6,24.6 11.9,24.3 15.1,24.3 15.3,24.5 15.3,26.4 15,26.7 13.42,26.7
12FB on Top Layer "12FB_L01_P020" (solid, remove dead copper, pour order 20): 17.4,21.425 17.375,21.45 17.375,21.975 ccw(c16.892,21.975) 17.234,22.316 16.938,22.612 cw(c17.152,22.825) 16.85,22.825 16.85,24.3 16.95,24.4 17.675,24.4 17.8,24.275 17.8,22.621 cw(c17.076,22.603) 17.741,22.316 cw(c17.569,22.377) 17.7,22.25 ccw(c17.894,22.064) 17.625,22.058 17.625,21.45 17.6,21.425
12V on Top Layer "12V_L01_P027" (solid, remove dead copper, pour order 27): 4,24.75 9.75,24.75 12.5,27.5 13.25,27.5 13.4,27.35 13.4,26.7 13.95,26.7 14.25,27 14.25,29.25 13.75,29.75 9.5,29.75 6.75,32.5 2.25,32.5 1.75,32 1.75,30.5 2.25,30 2.75,30 3.25,29.5 3.25,25.5
12SW on Top Layer "12SW_L01_P019" (solid, remove dead copper, pour order 19): 16.7,19.3 16.7,18.3 16.4,18 16.1,18 16.1,18.9 16,19 16.3,19.3
VIN on Top Layer "VIN_L01_P028" (solid, remove dead copper, pour order 28): 24,10.5 25.5,12 27.5,12 28.75,13.25 28.75,17.75 27,19.5 24.5,19.5 24.5,28.1 27.5,28.1 27.5,25.75 27.5,22.75 31.25,19 31.25,11.25 27,7 26,7 24.75,5.75
VIN on Top Layer "VIN_L01_P025" (solid, remove dead copper, pour order 25): 17.25,15.75 17.25,14.25 15.25,12.25 12.75,12.25 11.5,13.5 13.75,15.75
VIN on Top Layer "VIN_L01_P029" (solid, remove dead copper, pour order 29): 10.5,13.5 10.5,8 11,7.5 13,7.5 17.5,3 25,3 25,10.5 24,10.5 24,9.5 21,9.5 20.5,9 20.5,7.75 cw(c19,7.75) 19,6.25 cw(c19,7.75) 17.5,7.75 17.5,8.15 ccw(c17.2,8.15) 17.2,8.45 16.3,8.45 13.75,11 13.75,13.5
CN_GND on Top Layer "CN_GND_L01_P024" (solid, remove dead copper, pour order 24): 17.2,7.8 ccw(c18.95,7.8) 18.95,6.05 ccw(c18.95,7.8) 20.7,7.8 20.7,8.7 21.5,9.5 21.5,10.75 18.5,10.75 18.25,10.5 18.25,9.5 17.2,8.45
GND on Layer 2 "GND_L03_P034" (solid, remove dead copper, pour order 34): 0,69 0,0 40,0 40,69
GND on Bottom Layer "GND_L04_P035" (solid, remove dead copper, pour order 35): 0,69 0,0 40,0 40,69

## Keep-outs
Keep-Out Layer:
  lines w0.2: 0,0 0,69 40,69 40,0 28,0 0,0

## Other copper
Top Layer: